# Allegro board dog2.brd
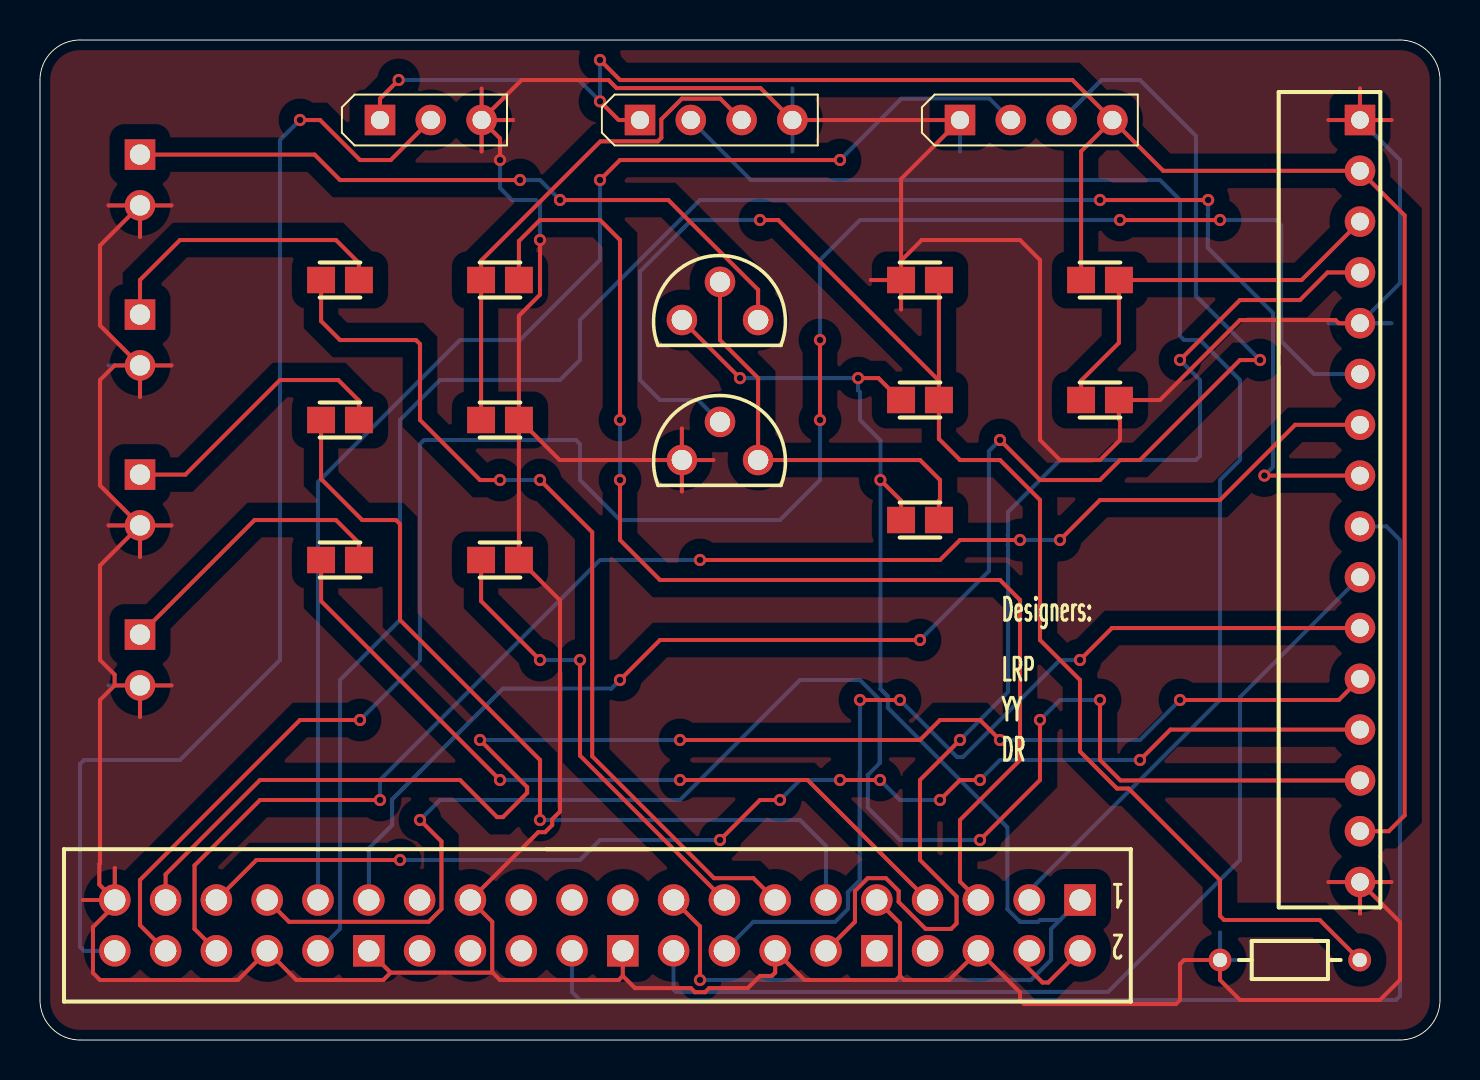
[diagram p0: board, top side]
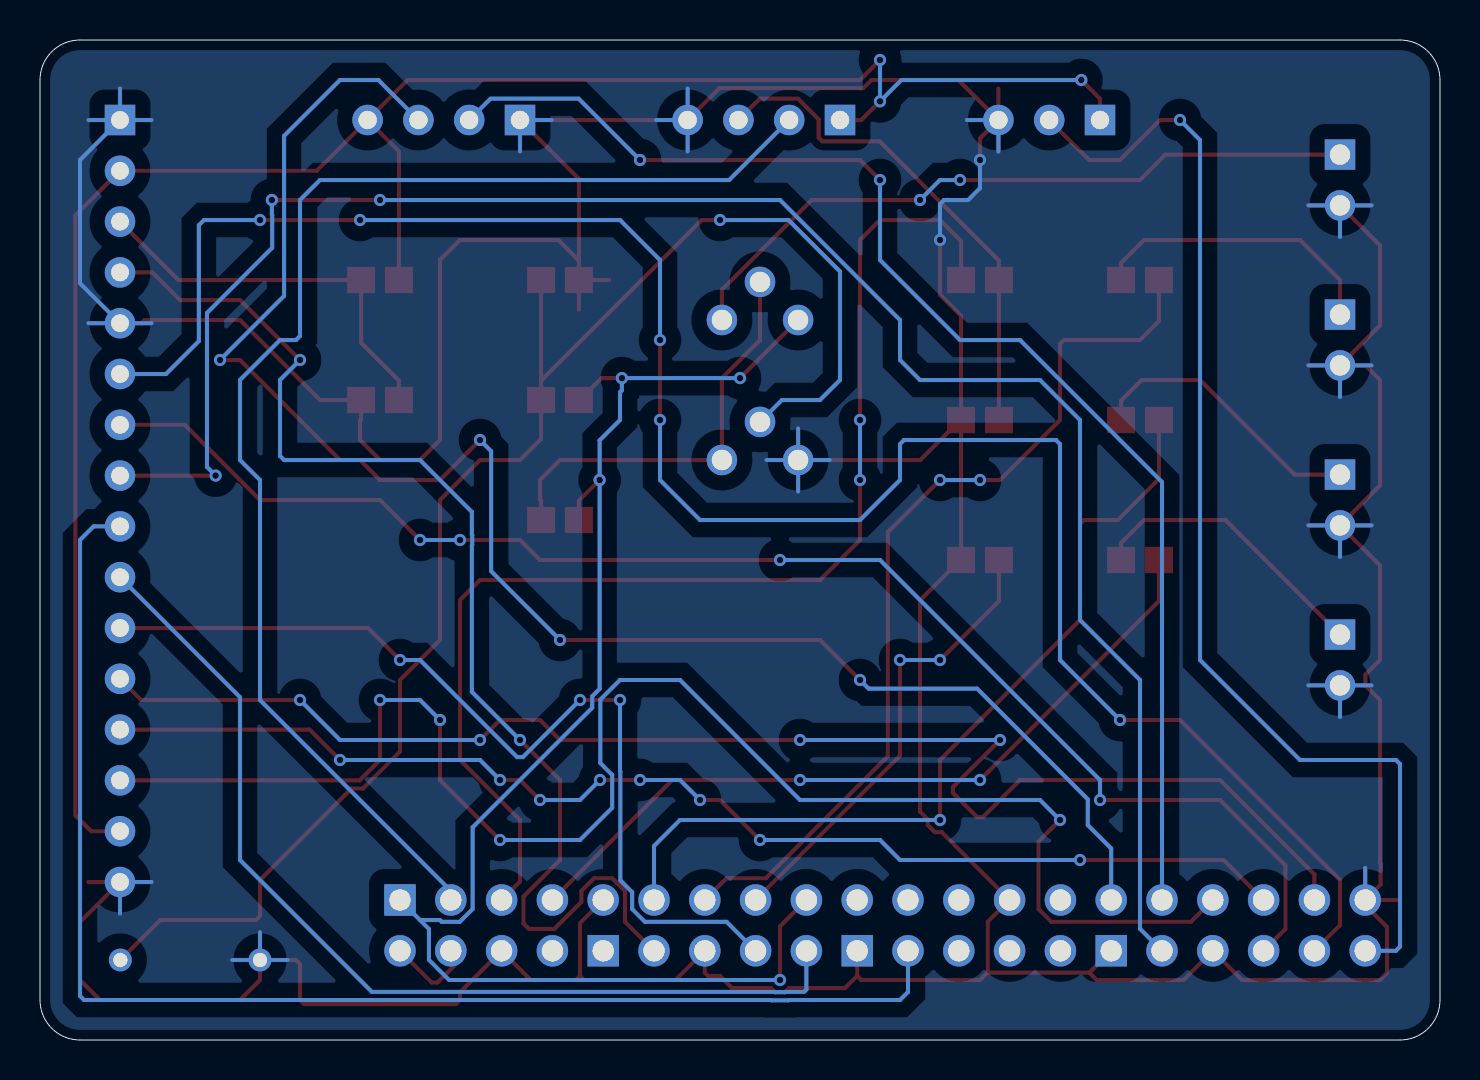
[diagram p1: board, bottom side, seen from below]

Outline 70 x 50 mm; copper layers: TOP, BOTTOM. Coordinates in mm from the lower left corner of the outline.
Outline path: 0,48 0,2 arc(0.59,0.59) 2,0 68,0 arc(69.41,0.59) 70,2 70,48 arc(69.41,49.41) 68,50 2,50 arc(0.59,49.41) 0,48

## Design rules (mm)
constraint set DEFAULT: min track width 0.203

## Placement (name value [footprint] x y rotation side)
C1  1u  [C0805_ROLA]  44 38 0 top
D1  LED  [LED_3MM_ROLA]  5 19 270 top
D2  LED  [LED_3MM_ROLA]  5 27 270 top
D3  LED  [LED_3MM_ROLA]  5 35 270 top
D4  1N4376  [LED_3MM_ROLA]  5 43 270 top
Q3  TN4037  [TO92B_ROLA]  34 36 0 top
Q4  TN2219A  [TO92B_ROLA]  34 29 0 top
R2  10k  [JX_R0805]  23 24 0 top
R3  1k  [JX_R0805]  15 24 0 top
R4  1k  [JX_R0805]  15 31 0 top
R5  1k  [JX_R0805]  15 38 0 top
R7  680  [JX_R0805]  23 38 0 top
R8  1.5k  [JX_R0805]  23 31 0 top
R9  100k  [JX_R0805]  44 32 0 top
R10  10k  [JX_R0805]  44 26 0 top
R11  {r3}  [AXRCR05]  59 4 0 top
R12  1k  [JX_R0805]  53 38 0 top
R13  1k  [JX_R0805]  53 32 0 top
U1  raspberry  [MY_WALCON100VHTM2OESW32540]  52 7 180 top
U2  LCD  [SIP16]  66 46 0 top
U4  HX711  [SIP4]  46 46 90 top
U6  HC-SR04  [SIP4]  30 46 90 top
U7  Servo  [SIP3]  17 46 90 top

## Library data of the parts
C1 = C
D1-D3 = LED
D4 = 1N4376
Q3 = TN4037
Q4 = TN2219A
R2-R5 R7-R13 = R
U1 = raspberry
U2 = LCD: Tolerance: ***; User Part Number: ***
U4 = HX711: User Part Number: ***
U6 = HC-SR04: User Part Number: ***
U7 = Servo: User Part Number: ***

## Footprints (pads in the part's own frame, mm; a bottom-side part is the same pattern mirrored in y, then rotated)
AXRCR05
  round 1.143 hole 0.711: 1(0,0) 2(6.985,0)
C0805_ROLA
  rect 1.397x1.321 smd: 1(-0.946,0) 2(0.946,0)
JX_R0805
  rect 1.397x1.321 smd: 1(-0.946,0) 2(0.946,0)
LED_3MM_ROLA
  rect 1.524x1.524 hole 1.016: 1(-1.27,0)
  round 1.524 hole 1.016: 2(1.27,0)
MY_WALCON100VHTM2OESW32540
  rect 1.575x1.575 hole 1.067: 1(0,0) 10(10.16,2.54) 20(22.86,2.54) 30(35.56,2.54)
  round 1.575 hole 1.067: 2(0,2.54) 3(2.54,0) 4(2.54,2.54) 5(5.08,0) 6(5.08,2.54) 7(7.62,0) 8(7.62,2.54) 9(10.16,0) 11(12.7,0) 12(12.7,2.54) 13(15.24,0) 14(15.24,2.54) 15(17.78,0) 16(17.78,2.54) 17(20.32,0) 18(20.32,2.54) 19(22.86,0) 21(25.4,0) 22(25.4,2.54) 23(27.94,0) 24(27.94,2.54) 25(30.48,0) 26(30.48,2.54) 27(33.02,0) 28(33.02,2.54) 29(35.56,0) 31(38.1,0) 32(38.1,2.54) 33(40.64,0) 34(40.64,2.54) 35(43.18,0) 36(43.18,2.54) 37(45.72,0) 38(45.72,2.54) 39(48.26,0) 40(48.26,2.54)
SIP3
  rect 1.524x1.524 hole 0.914: 1(0,0)
  round 1.524 hole 0.914: 2(0,-2.54) 3(0,-5.08)
SIP4
  rect 1.524x1.524 hole 0.914: 1(0,0)
  round 1.524 hole 0.914: 2(0,-2.54) 3(0,-5.08) 4(0,-7.62)
SIP16
  rect 1.524x1.524 hole 0.889: 1(0,0)
  round 1.524 hole 0.889: 2(0,-2.54) 3(0,-5.08) 4(0,-7.62) 5(0,-10.16) 6(0,-12.7) 7(0,-15.24) 8(0,-17.78) 9(0,-20.32) 10(0,-22.86) 11(0,-25.4) 12(0,-27.94) 13(0,-30.48) 14(0,-33.02) 15(0,-35.56) 16(0,-38.1)
TO92B_ROLA
  round 1.524 hole 1.016: 1(-1.905,0) 2(0,1.905) 3(1.905,0)

## Nets
3.3V: Q3.1(E) R9.1 R10.1 U1.1 U1.17
5V: U1.2 U1.4
GND: C1.1 D1.2(CATHODE) D2.2(CATHODE) D3.2(CATHODE) D4.2(K) Q4.1(E) R2.2 R8.2 R11.1 R13.2 U1.6 U1.9 U1.14 U1.20 U1.25 U1.30 U1.34 U1.39 U2.1(VSS) U2.5 U2.16 U4.1 U6.4 U7.3
VCC: R12.1 U2.2 U2.15 U4.4(VCC) U6.1(VCC) U7.1(VCC)
GPIO2: U1.3 U6.2
GPIO3: R7.2 U1.5
GPIO4: R3.1 U1.7
GPIO5: U1.29 U4.3
GPIO6: U1.31 U4.2
GPIO8: U1.24
GPIO9: U1.21
GPIO10: U1.19
GPIO11: U1.23
GPIO12: U1.32 U2.8
GPIO13: U1.33 U2.14
GPIO16: U1.36 U2.7
GPIO17: R4.1 U1.11
GPIO18: U1.12 U2.4
GPIO19: U1.35 U2.13
GPIO20: U1.38 U2.6
GPIO21: U1.40 U7.2
GPIO22: R2.1 U1.15
GPIO23: U1.16 U2.11
GPIO24: U1.18 U2.10
GPIO25: U1.22 U2.9
GPIO26: U1.37 U2.12
GPIO27: R5.1 U1.13
VO: R12.2 R13.1 U2.3
N02805: D1.1 R3.2
N02809: D2.1 R4.2
N02813: D3.1 R5.2
N03512: R7.1 R8.1 U6.3
N16896: C1.2 Q4.2 R9.2 R11.2
N16900: Q3.2 Q4.3 R10.2
N17024: D4.1 Q3.3

Pads without a net: U1 8 10 26 27 28

## Via types
v1: diameter 0.61, hole 0.33, TOP to BOTTOM, 61 vias

## Routing (per net, layer and track width the routed paths; a pad name or vN(x,y) marks a point on that pad's centre or on a via; arc(x,y) is an arc through that point)
3.3V: length 73.7
  TOP w0.203: U1.17 33,5.68 v1(33,3) ; R9.1 43.02,32 41.92,33.09 v1(40.9,33.09) ; R10.1 43.05,26.97 v1(42.02,28) ; Q3.1 v1(35,33.09)
  BOTTOM w0.203: U1.1 51,6 ; 51,6 50,6 49.91,5.91 49.01,5.91 48.37,6.55 48.37,10.63 42.39,16.61 42.39,17.18 42.02,17.56 v1(42.02,28) 42.02,29.98 41,31 41,32.39 40.9,32.49 v1(40.9,33.09) v1(35,33.09) ; 51,6 50.55,5.55 50.55,4.01 49.54,3 v1(33,3)
5V: length 4.7
  TOP w0.203: U1.2 50.41,2.87 50.13,2.87 49.14,3.86 49.14,4.14 U1.4
GND: length 369.4
  TOP w0.203: Q4.1 33.67,29 ; Q4.1 32.09,30.57 ; Q4.1 25.98,29 23.98,31 R8.2 ; Q4.1 32.09,27.43 ; 5,16.16 D1.2 ; D1.2 6.57,17.73 ; D1.2 3.73,17.73 ; U2.5 64.93,35.84 64.77,36 60,36 56,32 R13.2 53.95,31.03 54,30.98 54,30 53,29 51,29 50,30 50,39 49,40 44.09,40 43.05,38.97 ; D2.2 3,27.73 3,33 3.73,33.73 D3.2 ; D2.2 6.57,25.73 ; D2.2 3,23.73 3,19 3.73,18.27 3.73,17.73 ; D2.2 3.43,25.73 ; D2.2 5,24.16 ; D3.2 3,35.73 3,39.73 D4.2 ; D3.2 5,32.16 ; D3.2 6.57,33.73 ; 29.14,3.2 29.75,2.59 32.54,2.59 32.75,2.39 33.25,2.39 33.46,2.59 35.39,2.59 36,3.2 36.6,3.2 36.76,3.37 U1.14 38.22,3 42.8,3 43,3.2 ; 29.14,3.2 28.94,3 23,3 22.61,3.39 ; 29.14,3.2 U1.20 ; U1.39 3.74,6.74 2.65,5.65 2.65,3.35 3,3 9.9,3 U1.34 12.82,3 17.16,3 17.53,3.37 ; U1.39 3.74,8.6 ; U1.39 2.14,7 ; U1.39 2.97,7.77 2.97,8.8 3,8.83 3,17 3.73,17.73 ; U7.3 23.65,46 ; U7.3 22.08,47.57 ; U7.3 23,45.08 v1(23,44) ; U7.3 22.08,44.43 ; U7.3 24.08,48 28.43,48 28.83,47.59 36.03,47.59 U6.4 U4.1 43.05,43.05 43.05,38.97 ; 66,6.33 U2.16 ; U2.16 68,5.9 68,3 67,2 60,2 59,3 R11.1 57.2,4 57,3.8 57,2 56.8,1.8 49.2,1.8 49,2 49,2.38 U1.6 45.46,3 43.2,3 43,3.2 ; U2.16 64.42,7.9 ; U2.16 67.57,7.9 ; 43.05,38.97 C1.1 ; 41.54,38 C1.1 ; C1.1 43.05,36.53 ; 43,3.2 43,5.84 U1.9 ; 17.53,3.37 U1.30 ; 17.53,3.37 22.59,3.37 22.61,3.39 ; R8.2 R2.2 23.98,24 26,21.98 26,11.43 25.61,11.03 25.61,10.75 25.25,10.39 24.91,10.39 U1.25 22.61,5.91 22.61,3.39 ; R8.2 23.95,36.21 25,37.26 v1(25,40) ; U2.1 66,47.57 ; U2.1 64.42,46 ; U2.1 67.57,46 ; 3.43,41.73 D4.2 ; D4.2 5,40.16 ; D4.2 6.57,41.73
  BOTTOM w0.203: U2.5 68,37.84 68,44 U2.1 ; U2.5 64.42,35.84 ; U2.5 67.57,35.84 ; 22.08,44.43 U7.3 23.65,46 ; 5,40.16 D4.2 ; D4.2 3.43,41.73 ; D4.2 6.57,41.73 ; U2.1 66,47.57 ; U2.1 67.57,46 ; U2.1 64.42,46 ; 32.09,27.43 Q4.1 ; Q4.1 30.52,29 ; Q4.1 33.67,29 ; Q4.1 32.09,30.57 ; 64.42,7.9 U2.16 66,6.33 ; 5,32.16 D3.2 ; D3.2 6.57,33.73 ; D3.2 3.43,33.73 ; 46,44.43 U4.1 44.43,46 ; R11.1 59,5.38 ; R11.1 57.62,4 ; R11.1 60.38,4 ; U6.4 39.19,46 ; U6.4 37.62,47.57 ; U6.4 37.62,44.43 ; 3.43,25.73 D2.2 ; D2.2 5,24.16 ; D2.2 6.57,25.73 ; v1(25,40) 25,41.8 24.8,42 23.59,42 23,42.59 v1(23,44) ; 5,16.16 D1.2 ; D1.2 6.57,17.73 ; D1.2 3.43,17.73 ; U1.39 3.74,8.6
VCC: length 102
  TOP w0.203: v1(28,46.93) 28.93,46 U6.1 ; U7.1 17,47.07 v1(17.93,48) ; R12.1 52.05,44.43 U4.4 ; U4.4 56.16,43.46 U2.2 68.23,41.23 68.23,11.23 67.44,10.44 U2.15 ; U4.4 51.62,48 29,48 v1(28,49)
  BOTTOM w0.203: v1(28,49) v1(28,46.93) 26.93,48 v1(17.93,48)
GPIO2: length 67.2
  BOTTOM w0.203: U6.2 35.54,43 56,43 57,42 57,35.2 57.2,35 58,35 60,33 60,29 59,28 59,17 49.46,7.46 U1.3
GPIO3: length 60.7
  TOP w0.203: v1(29,31) 29,40 28,41 25,41 23.95,39.95 R7.2 ; v1(29,28) 29,25 31,23 48,23 49,22 49,14 46,11 46,7.92 U1.5
  BOTTOM w0.203: v1(29,31) v1(29,28)
GPIO4: length 38.6
  TOP w0.203: R3.1 14.05,21.95 v1(23,13) ; U1.7 38.38,13 v1(32,13)
  BOTTOM w0.203: v1(23,13) v1(32,13)
GPIO5: length 84.4
  TOP w0.203: v1(48,30) 50,28 53,28 54,29 55,29 60,34 v1(61,34) ; v1(44,20) 31,20 v1(29,18)
  BOTTOM w0.203: U1.29 16.44,9.58 17.61,10.75 17.61,12.03 23.14,17.57 28.57,17.57 v1(29,18) ; v1(48,30) 47.44,29.44 47.44,23.44 v1(44,20) ; U4.3 53.08,48 55,48 57.8,45.2 57.8,37.2 v1(61,34)
GPIO6: length 66.3
  TOP w0.203: v1(40,44) 29,44 v1(28,43)
  BOTTOM w0.203: v1(28,43) 28,39 24,35 21,35 13.9,27.9 U1.31 ; v1(40,44) 43.07,47.07 47.47,47.07 U4.2
GPIO12: length 94.5
  TOP w0.203: U2.8 v1(61.22,28.22) ; v1(58.41,42) v1(53,42)
  BOTTOM w0.203: U1.32 15,5.56 15,18 18,21 18,31 20,33 26,33 27,34 27,36 33,42 v1(53,42) ; v1(58.41,42) 58.41,41.27 58.39,41.25 58.39,39.61 61.65,36.35 61.65,28.65 v1(61.22,28.22)
GPIO13: length 79.6
  TOP w0.203: v1(47,10) 50,13 v1(50,16) ; v1(19,11) 20.07,9.93 20.07,6.55 19.43,5.91 12.45,5.91 U1.33 ; v1(53,17) 53,14 54.02,12.98 U2.14
  BOTTOM w0.203: v1(50,16) 51,17 v1(53,17) ; v1(19,11) 20,12 32,12 38,18 41,18 41.98,17.02 41.98,13.85 41.39,13.25 41.39,11.61 43,10 v1(47,10)
GPIO16: length 72.7
  TOP w0.203: v1(33,24) 45,24 46,25 v1(49,25) ; v1(51,25) 53,27 59,27 62.76,30.76 U2.7 ; U1.36 7.73,5.55 7.73,8.73 11,12 v1(17,12)
  BOTTOM w0.203: v1(33,24) 28,24 17,13 v1(17,12) ; v1(51,25) v1(49,25)
GPIO17: length 43.1
  TOP w0.203: R4.1 14.05,28.05 16.11,26 17.8,26 18,25.8 18,21 25,14 v1(25,11)
  BOTTOM w0.203: v1(25,11) 38,11 39.3,9.7 U1.11
GPIO18: length 60.4
  TOP w0.203: U2.4 64.38,38.38 63,37 60,37 v1(57,34) ; v1(46,15) 44,13 44,9 45.83,7.17 45.83,5.83 45.55,5.55 44.28,5.55 42.93,6.9 42.93,7.45 42.29,8.09 41.39,8.09 40.75,7.45 40.75,5.91 U1.12
  BOTTOM w0.203: v1(46,15) 48.41,17.41 48.41,24.73 48.39,24.75 48.39,25.25 48.41,25.27 48.41,26.41 51,29 57.8,29 58,29.2 58,33 v1(57,34)
GPIO19: length 61.5
  TOP w0.203: U2.13 56.52,15.52 v1(55,14) ; v1(45,12) 46,13 v1(47,13) ; v1(37,12) 36,12 v1(34,10) ; v1(18,9) 10.82,9 U1.35 ; v1(42,13) v1(40,13)
  BOTTOM w0.203: v1(47,13) 48,14 v1(55,14) ; v1(18,9) 27,9 28,10 v1(34,10) ; v1(37,12) 38,13 v1(40,13) ; v1(42,13) 43,12 v1(45,12)
GPIO20: length 102.5
  TOP w0.203: U1.38 5,5.74 5,8 13,16 v1(16,16) ; v1(59,41) v1(54,41) ; v1(39,35) v1(39,31)
  BOTTOM w0.203: v1(59,41) 61.8,41 62.06,40.74 62.06,34.94 63.7,33.3 U2.6 ; v1(54,41) 41,41 39,39 v1(39,35) ; v1(16,16) 19,19 19,29.8 19.2,30 26.8,30 27,29.8 27,28 29,26 37,26 39,28 v1(39,31)
GPIO21: length 58.7
  TOP w0.203: v1(13,46) 14,46 16,44 17.54,44 U7.2
  BOTTOM w0.203: U1.40 2.2,4.46 2,4.66 2,13.8 2.2,14 7,14 12,19 12,45 v1(13,46)
GPIO22: length 23.2
  TOP w0.203: U1.15 27,14.22 v1(27,19) ; v1(25,19) 22.05,21.95 R2.1
  BOTTOM w0.203: v1(25,19) v1(27,19)
GPIO23: length 46.6
  TOP w0.203: U2.11 53.6,20.6 v1(52,19) ; v1(43,17) v1(41,17)
  BOTTOM w0.203: v1(52,19) 51,19 46.14,14.14 45.86,14.14 v1(43,17) ; U1.16 35.67,5.91 39.75,5.91 40.39,6.55 40.39,7.39 40.98,7.98 40.98,13.42 41,13.44 v1(41,17)
GPIO24: length 49.7
  BOTTOM w0.203: U2.10 60,17.14 60,9 53.41,2.41 33.27,2.41 33.25,2.39 32.75,2.39 32.73,2.41 31.8,2.41 31.68,2.52 U1.18
GPIO25: length 68.8
  BOTTOM w0.203: U1.22 26.6,2.4 27,2 32.56,2 32.58,1.98 33.42,1.98 33.44,2 67.8,2 68,2.2 68,25 67.32,25.68 U2.9
GPIO26: length 72.3
  TOP w0.203: U1.37 6.28,8.28 11,13 21,13 22.86,11.14 23.14,11.14 24.36,12.36 24.36,12.64 v1(22,15) ; U2.12 64.94,17 v1(57,17) ; v1(48,15) 47,16 45,16 44,15 v1(32,15)
  BOTTOM w0.203: v1(22,15) v1(32,15) ; v1(48,15) 55,15 v1(57,17)
GPIO27: length 45.5
  TOP w0.203: v1(25,28) 27.61,25.39 27.61,14.19 33.7,8.09 35.67,8.09 U1.13 ; R5.1 14.05,35.95 15,35 18.8,35 19,34.8 19,31 22,28 v1(23,28)
  BOTTOM w0.203: v1(23,28) v1(25,28)
VO: length 20
  TOP w0.203: R13.1 52.05,32.97 53.95,34.86 R12.2 63.08,38 U2.3
N02805: length 14.6
  TOP w0.203: D1.1 10.73,26 14.8,26 15.95,24.85 R3.2
N02809: length 14.3
  TOP w0.203: R4.2 15.95,31.97 14.91,33 12,33 7.27,28.27 D2.1
N02813: length 14.8
  TOP w0.203: D3.1 5,38 7,40 14.8,40 15.95,38.85 R5.2
N03512: length 25.3
  TOP w0.203: R8.1 R7.1 22.05,38.97 28.02,44.93 30.89,44.93 31.07,45.11 31.07,46.04 32.1,47.07 34.01,47.07 U6.3
N16896: length 76.7
  TOP w0.203: 44.95,32.97 36.91,41 v1(36,41) ; 44.95,32.97 R9.2 44.95,30.05 46,29 48,29 50,27 50,20 52,18 52,14.43 53.85,12.57 54.43,12.57 59,8 59,6.2 59.2,6 63.98,6 R11.2 ; 44.95,32.97 C1.2
  BOTTOM w0.203: Q4.2 32.9,32 31,32 30,33 30,38.43 32.57,41 v1(36,41)
N16900: length 21.2
  TOP w0.203: R10.2 44.95,26.97 45,27.02 45,28 44,29 Q4.3 35.9,33.09 34,35 Q3.2
N17024: length 35.2
  TOP w0.203: D4.1 13.73,44.27 15,43 v1(24,43) ; v1(26,42) 31.41,42 35.9,37.51 Q3.3
  BOTTOM w0.203: v1(24,43) 25,43 v1(26,42)

## Copper pours and planes (outline as drawn; the poured copper is in the pictures)
GND on TOP, BOTTOM: 2,0.51 0.95,0.95 0.51,2 0.51,48 0.95,49.05 2,49.49 68,49.49 69.05,49.05 69.49,48 69.49,2 69.05,0.95 68,0.51

## Text on the board
Ref Des/Silkscreen Top: Designers: | LRP | YY | DR
BODY_CENTER: FIGURE | FINISHED_SIZE | 13.0 | 28.0 | 35.0 | 36.0 | 40.0 | 42.0 | DRILL CHART: TOP to BOTTOM | ALL UNITS ARE IN MILS | TOLERANCE_DRILL | +0.0/-0.0 | +3.0/-3.0 | PLATED | QTY | 61 | 2 | 16 | 11 | 14 | 40
